# EAGLE board ellak2022 (EAGLE 9.7.0)

Size 326.97 x 147.7 mm. Coordinates in mm from the lower left corner, seen from the top.
Outline: 0,0 326.97,0 326.97,147.7 0,147.7 0,0
Copper layers (1*16): Top 0.035mm / dielectric 1.5mm / Bottom 0.035mm
Design rules "default": minimum track width 6mil, minimum drill 0.35mm, track to track 6mil, track to pad 6mil, pad to pad 6mil, via to via 6mil, smd to smd 6mil, copper to edge 40mil, drill to drill 6mil, minimum pad ring 10mil, minimum via ring 8mil, stop-mask expansion 4mil, vias tented up to drill 0mil, thermal gap 10mil

## Footprints (pad centres in the part's own frame; a part is rotated, then mirrored left to right if it is on the bottom)
LEDRD254W60D565H860B = drill 0.981 pad 1.581: 1 -1.27,0; 2 1.27,0
HC-SR04 = drill 1.016 long: 1 -3.81,0; 2 -1.27,0; 3 1.27,0; 4 3.81,0
1X08 = drill 1.016 long: 1 -8.89,0; 2 -6.35,0; 3 -3.81,0; 4 -1.27,0; 5 1.27,0; 6 3.81,0; 7 6.35,0; 8 8.89,0
RESAD1016W63L850D250B = drill 0.83 pad 1.43: 1 -5.08,0; 2 5.08,0
SG90 = drill 1.016 long: 1 -2.54,0; 2 0,0; 3 2.54,0
ARDUINO-UNO-R3-SHIELD = drill 1.016 pad 1.88: 3.3V 24.13,-2.54; 5V 24.13,0; A0 24.13,12.7; A1 24.13,15.24; A2 24.13,17.78; A3 24.13,20.32; A4 24.13,22.86; A5 24.13,25.4; AREF -24.13,-13.97; D2 -24.13,20.32; D3 -24.13,17.78; D4 -24.13,15.24; D5 -24.13,12.7; D6 -24.13,10.16; D7 -24.13,7.62; D8 -24.13,3.81; D9 -24.13,1.27; D10 -24.13,-1.27; D11 -24.13,-3.81; D12 -24.13,-6.35; D13 -24.13,-8.89; GND@0 24.13,2.54; GND@1 24.13,5.08; GND@2 -24.13,-11.43; IOREF 24.13,-7.62; NC 24.13,-10.16; RES 24.13,-5.08; RX -24.13,25.4; SCL -24.13,-19.05; SDA -24.13,-16.51; TX -24.13,22.86; VIN 24.13,7.62
JHD-162A = drill 1.016 long: 1 -19.05,0; 2 -16.51,0; 3 -13.97,0; 4 -11.43,0; 5 -8.89,0; 6 -6.35,0; 7 -3.81,0; 8 -1.27,0; 9 1.27,0; 10 3.81,0; 11 6.35,0; 12 8.89,0; 13 11.43,0; 14 13.97,0; 15 16.51,0; 16 19.05,0

## Placement (x,y rotation side)
D2  RED  [LEDRD254W60D565H860B]  300.28,121.46 180 top
DISTULTRAALOUM  DISTANCE-SENSOR-4PINHC-SR04  [HC-SR04]  160.21,119.03 0 top
DISTULTRAPLASTIC  DISTANCE-SENSOR-4PINHC-SR04  [HC-SR04]  269.8,121.46 0 top
DISTULTRAXART  DISTANCE-SENSOR-4PINHC-SR04  [HC-SR04]  51.96,119.67 0 top
JP1  PINHD-1X08_1X08M  [1X08]  242.09,46.65 0 top
R1  180  [RESAD1016W63L850D250B]  306.63,118.92 0 top
SERVOSERVOALOUM  SERVOSG90  [SG90]  112.87,138.7 180 top
SERVOSERVOPLASTIC  SERVOSG90  [SG90]  227.16,140.72 180 top
SERVOSERVOXARTI  SERVOSG90  [SG90]  6.99,138.94 180 top
U2  ARDUINO-UNO-R3-SHIELD  [ARDUINO-UNO-R3-SHIELD]  146.8,29.84 270 top
UΟΘΌΝΗ  LCD-16X2JHD-162A  [JHD-162A]  271.35,62.15 0 top

## Library data of the parts
D2 = Tinkercad; CATEGORY: Opto-Electronic; SUB-CATEGORY: LED; VALUE: LED_RED
DISTULTRAALOUM DISTULTRAPLASTIC DISTULTRAXART JP1 R1 SERVOSERVOALOUM SERVOSERVOPLASTIC SERVOSERVOXARTI U2 UΟΘΌΝΗ = Tinkercad

## Nets
D2_A: D2.1 R1.1
U2_5V: DISTULTRAALOUM.1 DISTULTRAPLASTIC.1 DISTULTRAXART.1 JP1.3 SERVOSERVOALOUM.2 SERVOSERVOPLASTIC.2 SERVOSERVOXARTI.2 U2.5V
U2_A4: JP1.1 U2.A4
U2_A5: JP1.2 U2.A5
U2_D2: DISTULTRAPLASTIC.3 U2.D2
U2_D3: DISTULTRAPLASTIC.2 U2.D3
U2_D4: DISTULTRAALOUM.3 U2.D4
U2_D5: DISTULTRAALOUM.2 U2.D5
U2_D6: DISTULTRAXART.3 U2.D6
U2_D7: DISTULTRAXART.2 U2.D7
U2_D8: SERVOSERVOPLASTIC.3 U2.D8
U2_D9: SERVOSERVOALOUM.3 U2.D9
U2_D10: SERVOSERVOXARTI.3 U2.D10
U2_D11: R1.2 U2.D11
U2_GND: D2.2 DISTULTRAALOUM.4 DISTULTRAPLASTIC.4 DISTULTRAXART.4 JP1.4 SERVOSERVOALOUM.1 SERVOSERVOPLASTIC.1 SERVOSERVOXARTI.1 U2.GND@0 U2.GND@1 U2.GND@2

## Tracks (layer width: path | path; a pad name or v marks a point on that pad's centre or on a via)
D2_A  (1 unrouted)
U2_5V  (7 unrouted)
U2_A4  (1 unrouted)
U2_A5  (1 unrouted)
U2_D2  (1 unrouted)
U2_D3  (1 unrouted)
U2_D4  (1 unrouted)
U2_D5  (1 unrouted)
U2_D6  (1 unrouted)
U2_D7  (1 unrouted)
U2_D8  (1 unrouted)
U2_D9  (1 unrouted)
U2_D10  (1 unrouted)
U2_D11  (1 unrouted)
U2_GND  (10 unrouted)